# EAGLE board ZipIT_rev2 (EAGLE 6.5.0)
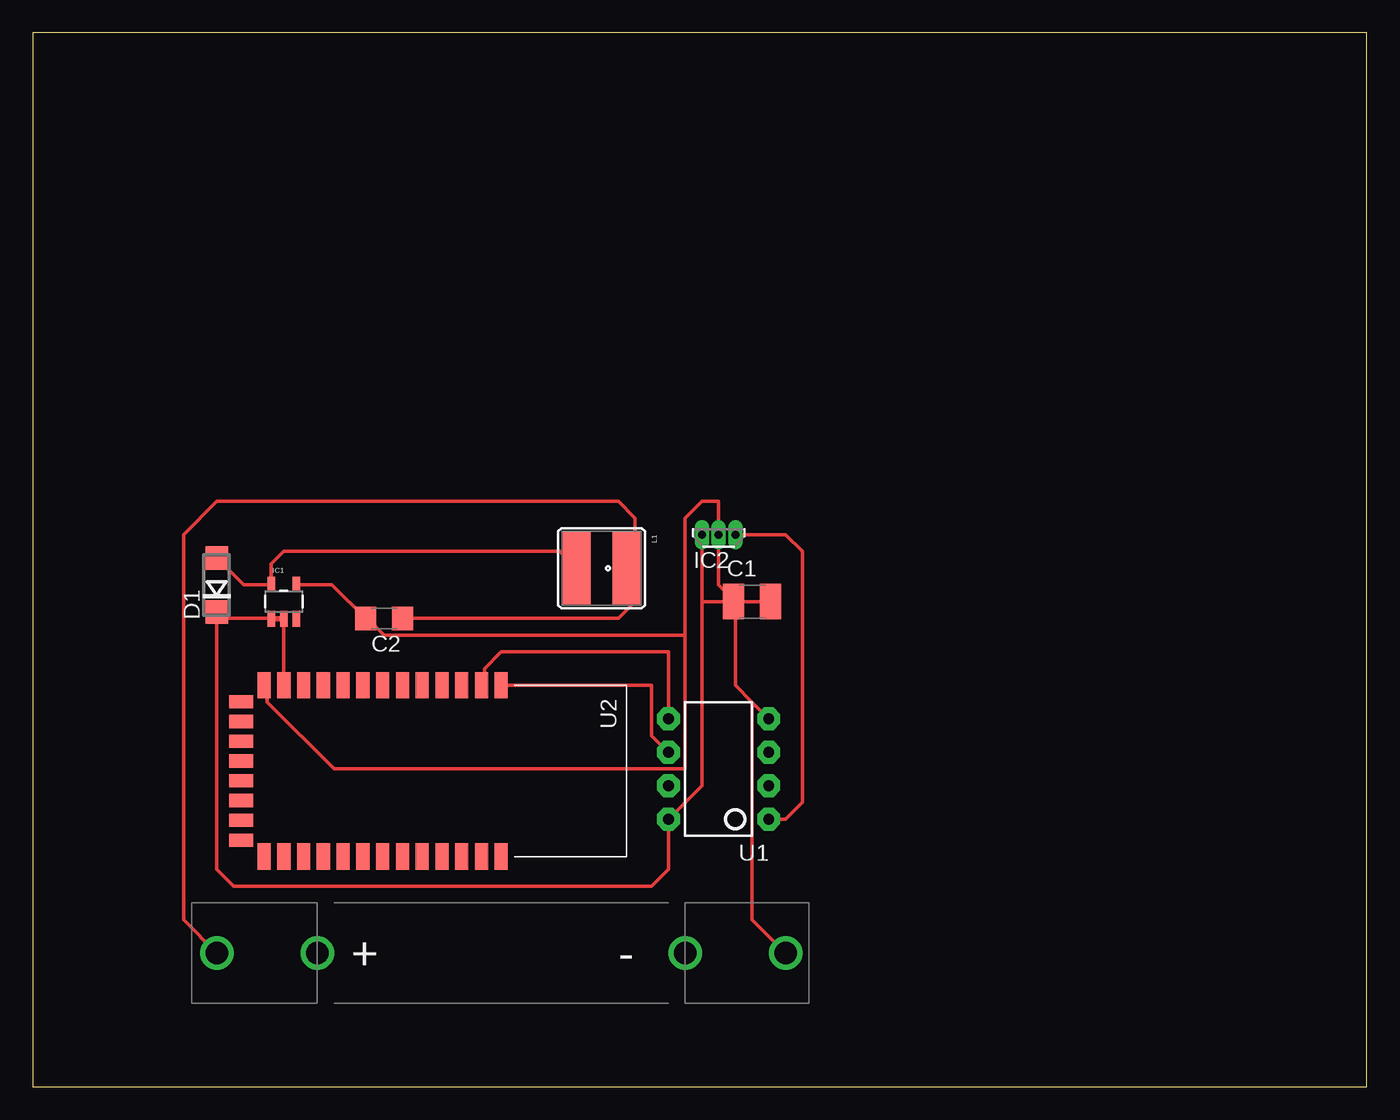
[diagram p0: board, top side]

Size 101.27 x 80 mm. Coordinates in mm from the lower left corner, seen from the top.
Outline: 0,0 101.27,0 101.27,80 0,80 0,0
Copper layers (1*16): Top 0.035mm / dielectric 1.5mm / Bottom 0.035mm
Design rules "default": minimum track width 10mil, minimum drill 24mil, track to track 8mil, track to pad 8mil, pad to pad 8mil, via to via 8mil, smd to smd 8mil, copper to edge 40mil, drill to drill 8mil, minimum pad ring 10mil, minimum via ring 8mil, stop-mask expansion 4mil, vias tented up to drill 0mil, thermal gap 10mil

## Footprints (pad centres in the part's own frame; a part is rotated, then mirrored left to right if it is on the bottom)
BATTERY-AAA = drill 1.702: GND@1 21.59,0; GND@2 13.97,0; PWR@1 -21.59,0; PWR@2 -13.97,0
C1210 = smd 1.6 x 2.7: 1 -1.4,0; 2 1.4,0
C1206 = smd 1.6 x 1.8: 1 -1.4,0; 2 1.4,0
DO214AC = smd 1.8 x 1.7: A 2.05,0; C -2.05,0
SOT23-5 = smd 0.55 x 1.2: 1 -0.95,-1.3; 2 0,-1.3; 3 0.95,-1.3; 4 0.95,1.3; 5 -0.95,1.3
SIP3-UA = drill 0.6 pad 0.7 long: 1 -1.27,0; 2 0,0; 3 1.27,0
CR54 = smd 5.5 x 2.15: P$1 0,1.92; P$2 0,-1.92
DIP08 = drill 0.813 pad 1.727 octagon: 1 -3.81,-3.81; 2 -1.27,-3.81; 3 1.27,-3.81; 4 3.81,-3.81; 5 3.81,3.81; 6 1.27,3.81; 7 -1.27,3.81; 8 -3.81,3.81
BLUETOOTH_SMD = smd 2 x 1: 1 0,0; 2 0,-1.5; 3 0,-3; 4 0,-4.5; 5 0,-6; 6 0,-7.5; 7 0,-9; 8 0,-10.5; 9 0,-12; 10 0,-13.5; 11 0,-15; 12 0,-16.5; 13 0,-18; 22 13,-18; 23 13,-16.5; 24 13,-15; 25 13,-13.5; 26 13,-12; 27 13,-10.5; 28 13,-9; 29 13,-7.5; 30 13,-6; 31 13,-4.5; 32 13,-3; 33 13,-1.5; 34 13,0 | smd 1 x 1.8: 14 1.25,-19.75; 15 2.75,-19.75; 16 4.25,-19.75; 17 5.75,-19.75; 18 7.25,-19.75; 19 8.75,-19.75; 20 10.25,-19.75; 21 11.75,-19.75

## Placement (x,y rotation side)
BAT1  [BATTERY-AAA]  35.56,10.16 0 top
C1  68uF  [C1210]  54.61,36.83 0 top
C2  10uF  [C1206]  26.67,35.56 180 top
D1  [DO214AC]  13.97,38.1 90 top
IC1  [SOT23-5]  19.05,36.83 0 top
IC2  A1203UA  [SIP3-UA]  52.07,41.91 0 top
L1  47uF  [CR54]  43.18,39.37 270 top
U1  TINY85-20-DIP  [DIP08]  52.07,24.13 90 top
U2  HC_05  [BLUETOOTH_SMD]  35.56,30.48 270 top

## Library data of the parts
BAT1 = SparkFun-Electromechanical
C1 C2 = eagle-ltspice; SPICEMODEL: NONE; SPICEPREFIX: C
D1 = diode
IC1 = SparkFun-PowerIC
IC2 = allegro; OC_FARNELL: 1521672; OC_NEWARK: unknown
L1 = SparkFun-Passives
U1 = SparkFun-DigitalIC; PROD_ID: IC-09445
U2 = SerialPortBluetooth

## Nets
GND: BAT1.GND@1 C1.2 C2.2 IC1.4 IC2.2 U1.4 U2.13
N$1: D1.A IC1.5 L1.P$2
N$2: IC2.3 U1.1
N$3: U1.6 U2.1
N$4: U1.5 U2.2
VIN: BAT1.PWR@1 C2.1 L1.P$1
VOUT: C1.1 D1.C IC1.1 IC1.2 IC2.1 U1.8 U2.12

## Tracks (layer width: path | path; a pad name or v marks a point on that pad's centre or on a via)
GND
  Top 0.254: 53.34,36.83 52.07,38.1 IC2.2 52.07,44.45 50.8,44.45 49.53,43.18 49.53,34.29 | 54.61,29.21 53.34,30.48 53.34,36.83 | 54.61,29.21 U1.4 | 53.34,36.83 C1.2 | 54.61,29.21 54.61,12.7 BAT1.GND@1 | 49.53,34.29 26.67,34.29 25.4,35.56 C2.2 22.7,38.13 IC1.4 | 49.53,34.29 49.53,24.13 22.86,24.13 17.78,29.21 17.78,30.48 U2.13
N$1
  Top 0.254: D1.A 15.99,38.13 IC1.5 18.1,39.69 19.05,40.64 39.99,40.64 L1.P$2
N$2
  Top 0.254: U1.1 57.15,20.32 58.42,21.59 58.42,40.64 57.15,41.91 IC2.3
N$3
  Top 0.254: U2.1 46.99,30.48 46.99,26.67 U1.6
N$4
  Top 0.254: U1.5 48.26,33.02 35.56,33.02 34.29,31.75 34.29,30.48 U2.2
VIN
  Top 0.254: 27.94,35.56 C2.1 44.45,35.56 45.72,36.83 45.72,38.75 L1.P$1 45.72,39.99 45.72,43.18 44.45,44.45 13.97,44.45 11.43,41.91 11.43,12.7 BAT1.PWR@1
VOUT
  Top 0.254: 13.97,35.56 13.97,16.51 15.24,15.24 46.99,15.24 48.26,16.51 U1.8 50.8,22.86 50.8,36.83 | 13.97,35.56 19.05,35.56 IC1.2 U2.12 | 13.97,35.56 D1.C | 50.8,36.83 IC2.1 | 50.8,36.83 C1.1
  Top 0.406: IC1.1 IC1.2